# EAGLE board Board_50x70 (EAGLE 9.2.2)
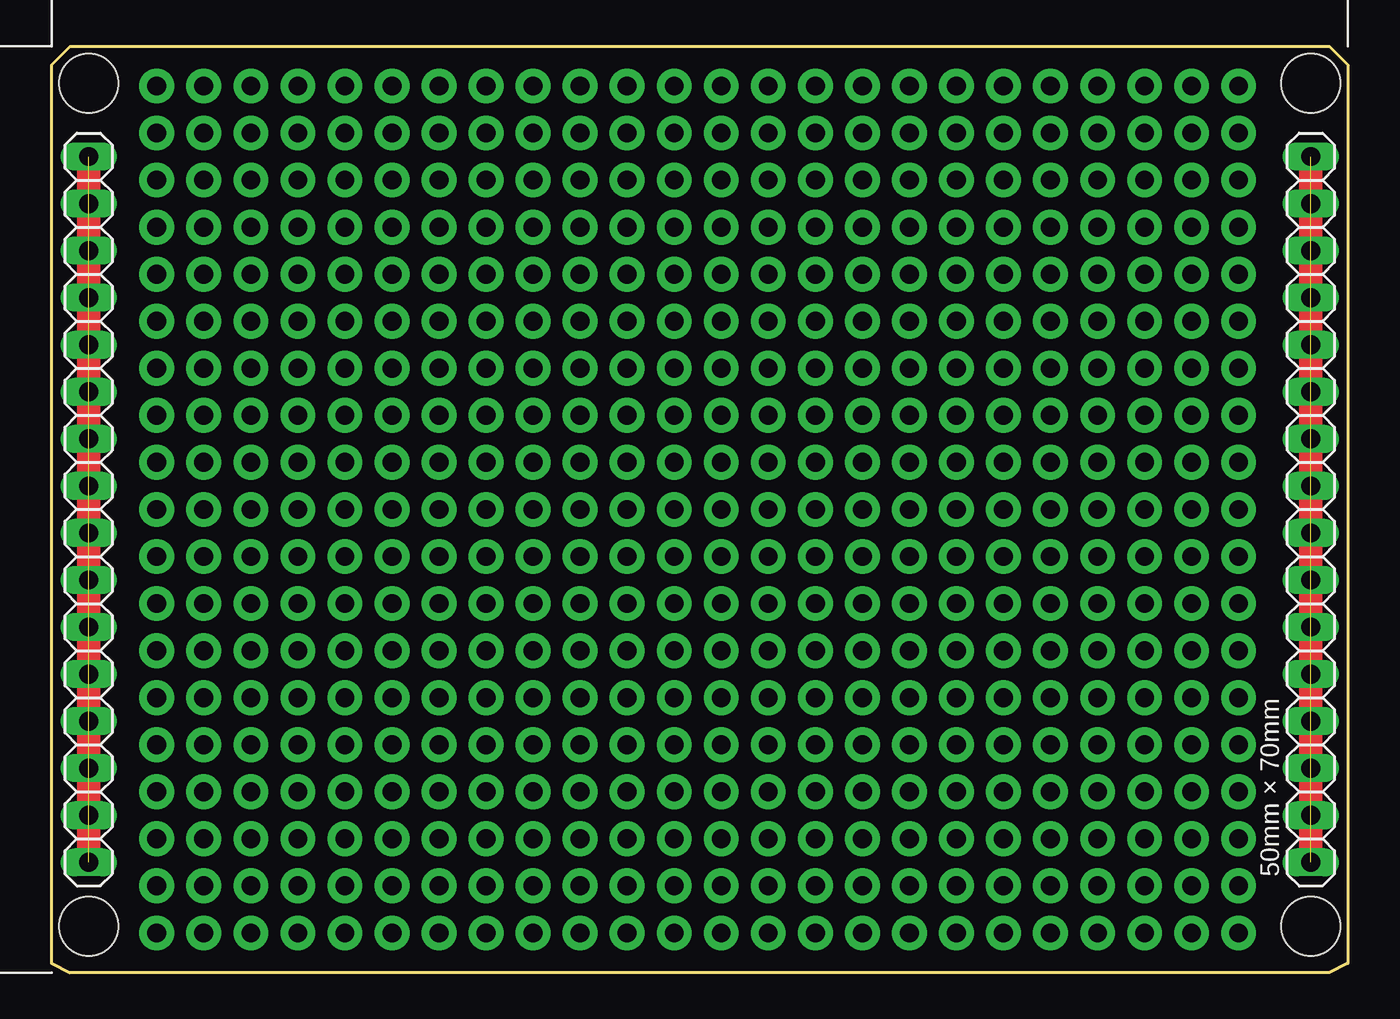
[diagram p0: board, top side]
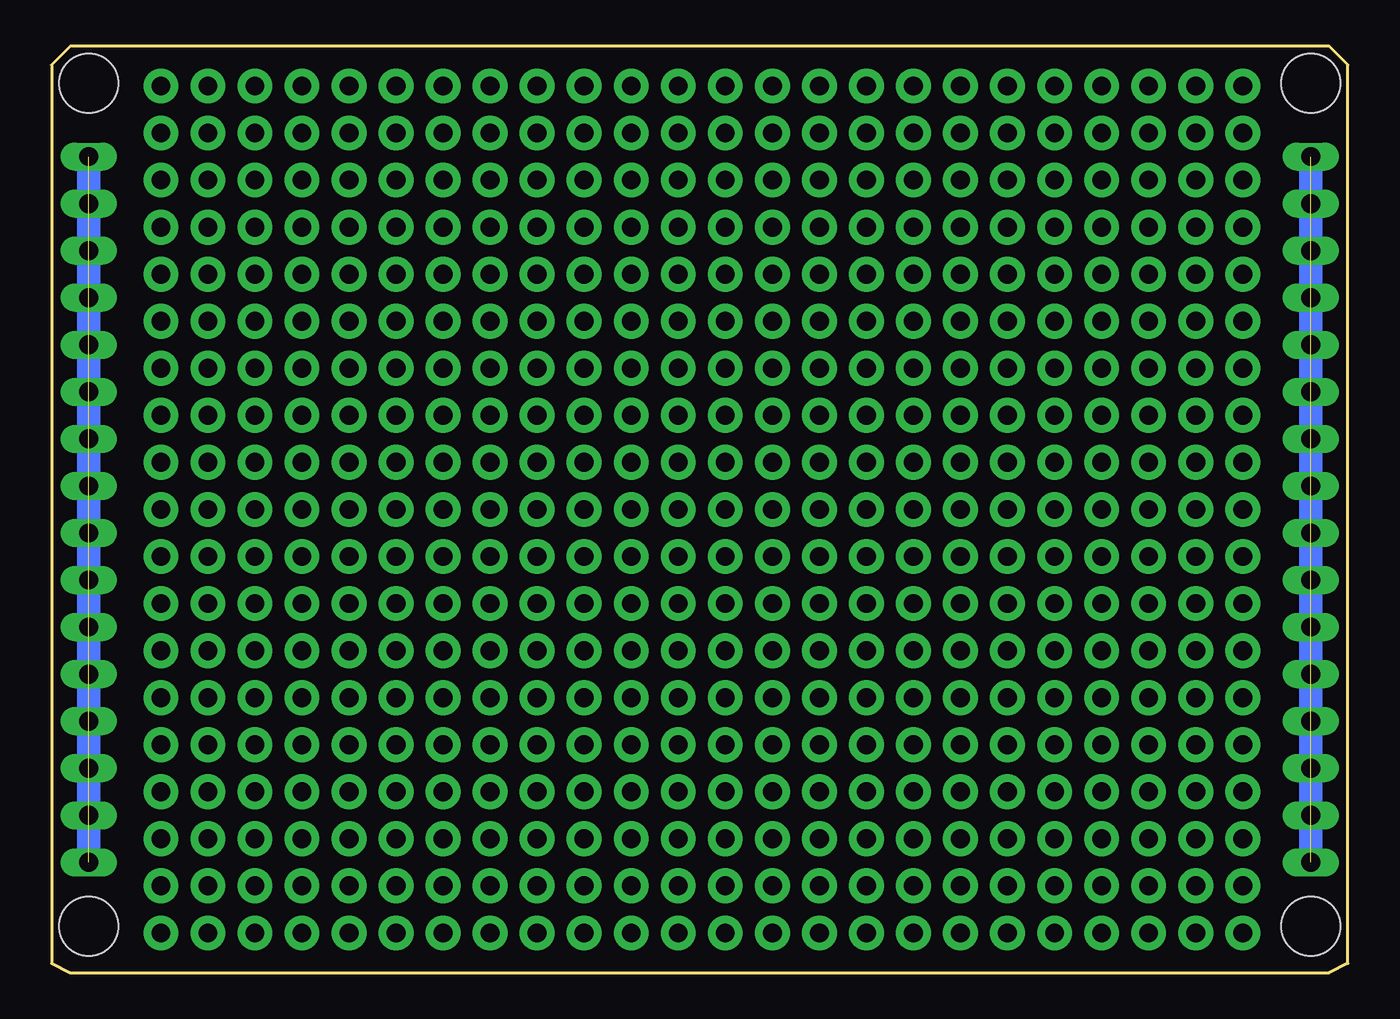
[diagram p1: board, bottom side, seen from below]

Size 70 x 50 mm. Coordinates in mm from the lower left corner, seen from the top.
Outline: 0,0.5 0,49 1,50 69,50 70,49 70,0.5 69,0 1,0 0,0.5
Copper layers (1*16): Top 0.035mm / dielectric 1.5mm / Bottom 0.035mm
Design rules "default *": minimum track width 6mil, minimum drill 0.35mm, track to track 6mil, track to pad 6mil, pad to pad 6mil, via to via 6mil, smd to smd 6mil, copper to edge 10mil, drill to drill 6mil, minimum pad ring 10mil, minimum via ring 8mil, stop-mask expansion 4mil, vias tented up to drill 0mil, thermal gap 10mil
Net classes: 0 default: width 0.305 mm; 1 thick: width 1.27 mm
Holes 3.2 mm at 68,48 68,2.5 2,48 2,2.5

## Footprints (pad centres in the part's own frame; a part is rotated, then mirrored left to right if it is on the bottom)
1X19_NO_SILK = drill 1.016 pad 1.88: 1 0,0; 2 2.54,0; 3 5.08,0; 4 7.62,0; 5 10.16,0; 6 12.7,0; 7 15.24,0; 8 17.78,0; 9 20.32,0; 10 22.86,0; 11 25.4,0; 12 27.94,0; 13 30.48,0; 14 33.02,0; 15 35.56,0; 16 38.1,0; 17 40.64,0; 18 43.18,0; 19 45.72,0
1X16 = drill 1.016 long: 1 -19.05,0; 2 -16.51,0; 3 -13.97,0; 4 -11.43,0; 5 -8.89,0; 6 -6.35,0; 7 -3.81,0; 8 -1.27,0; 9 1.27,0; 10 3.81,0; 11 6.35,0; 12 8.89,0; 13 11.43,0; 14 13.97,0; 15 16.51,0; 16 19.05,0

## Placement (x,y rotation side)
J2  [1X19_NO_SILK]  5.68,2.14 90 top
J3  [1X19_NO_SILK]  8.22,2.14 90 top
J4  [1X19_NO_SILK]  10.76,2.14 90 top
J5  [1X19_NO_SILK]  13.3,2.14 90 top
J6  [1X19_NO_SILK]  15.84,2.14 90 top
J7  [1X19_NO_SILK]  18.38,2.14 90 top
J8  [1X19_NO_SILK]  20.92,2.14 90 top
J9  [1X19_NO_SILK]  23.46,2.14 90 top
J10  [1X19_NO_SILK]  26,2.14 90 top
J11  [1X19_NO_SILK]  28.54,2.14 90 top
J12  [1X19_NO_SILK]  31.08,2.14 90 top
J13  [1X19_NO_SILK]  33.62,2.14 90 top
J14  [1X19_NO_SILK]  36.16,2.14 90 top
J15  [1X19_NO_SILK]  38.7,2.14 90 top
J16  [1X19_NO_SILK]  41.24,2.14 90 top
J17  [1X19_NO_SILK]  43.78,2.14 90 top
J18  [1X19_NO_SILK]  46.32,2.14 90 top
J19  [1X19_NO_SILK]  48.86,2.14 90 top
J20  [1X19_NO_SILK]  51.4,2.14 90 top
J21  [1X19_NO_SILK]  53.94,2.14 90 top
J22  [1X19_NO_SILK]  56.48,2.14 90 top
J23  [1X19_NO_SILK]  59.02,2.14 90 top
J24  [1X19_NO_SILK]  61.56,2.14 90 top
J25  [1X19_NO_SILK]  64.1,2.14 90 top
JP3  [1X16]  68,25 90 top
JP4  [1X16]  2,25 90 top

## Library data of the parts
J2-J25 = SparkFun-Connectors
JP3 JP4 = pinhead_v2

## Nets
SIDE1 [thick]: JP4.1 JP4.2 JP4.3 JP4.4 JP4.5 JP4.6 JP4.7 JP4.8 JP4.9 JP4.10 JP4.11 JP4.12 JP4.13 JP4.14 JP4.15 JP4.16
SIDE2 [thick]: JP3.1 JP3.2 JP3.3 JP3.4 JP3.5 JP3.6 JP3.7 JP3.8 JP3.9 JP3.10 JP3.11 JP3.12 JP3.13 JP3.14 JP3.15 JP3.16

## Tracks (layer width: path | path; a pad name or v marks a point on that pad's centre or on a via)
S$1
  Top 1.27: 2,44 2,6
S$2
  Top 1.27: 68,6 68,44
S$3
  Bottom 1.27: 2,44 2,6
S$4
  Bottom 1.27: 68,6 68,44
SIDE1  (15 unrouted)
SIDE2  (15 unrouted)

## Text on the board
tPlace: 50mm × 70mm